# Altium PCB SW6208 Demo board.PcbDoc (part 2 of 2)
Units mm, origin at the board's own origin, x right, y up, seen from the top; angles counter-clockwise.
Board outline 56.6 x 30 mm, 4 copper layers (Top Layer, Mid-Layer 1, Mid-Layer 2, Bottom Layer); 47 components, 75 nets, 261 pads, 411 vias.
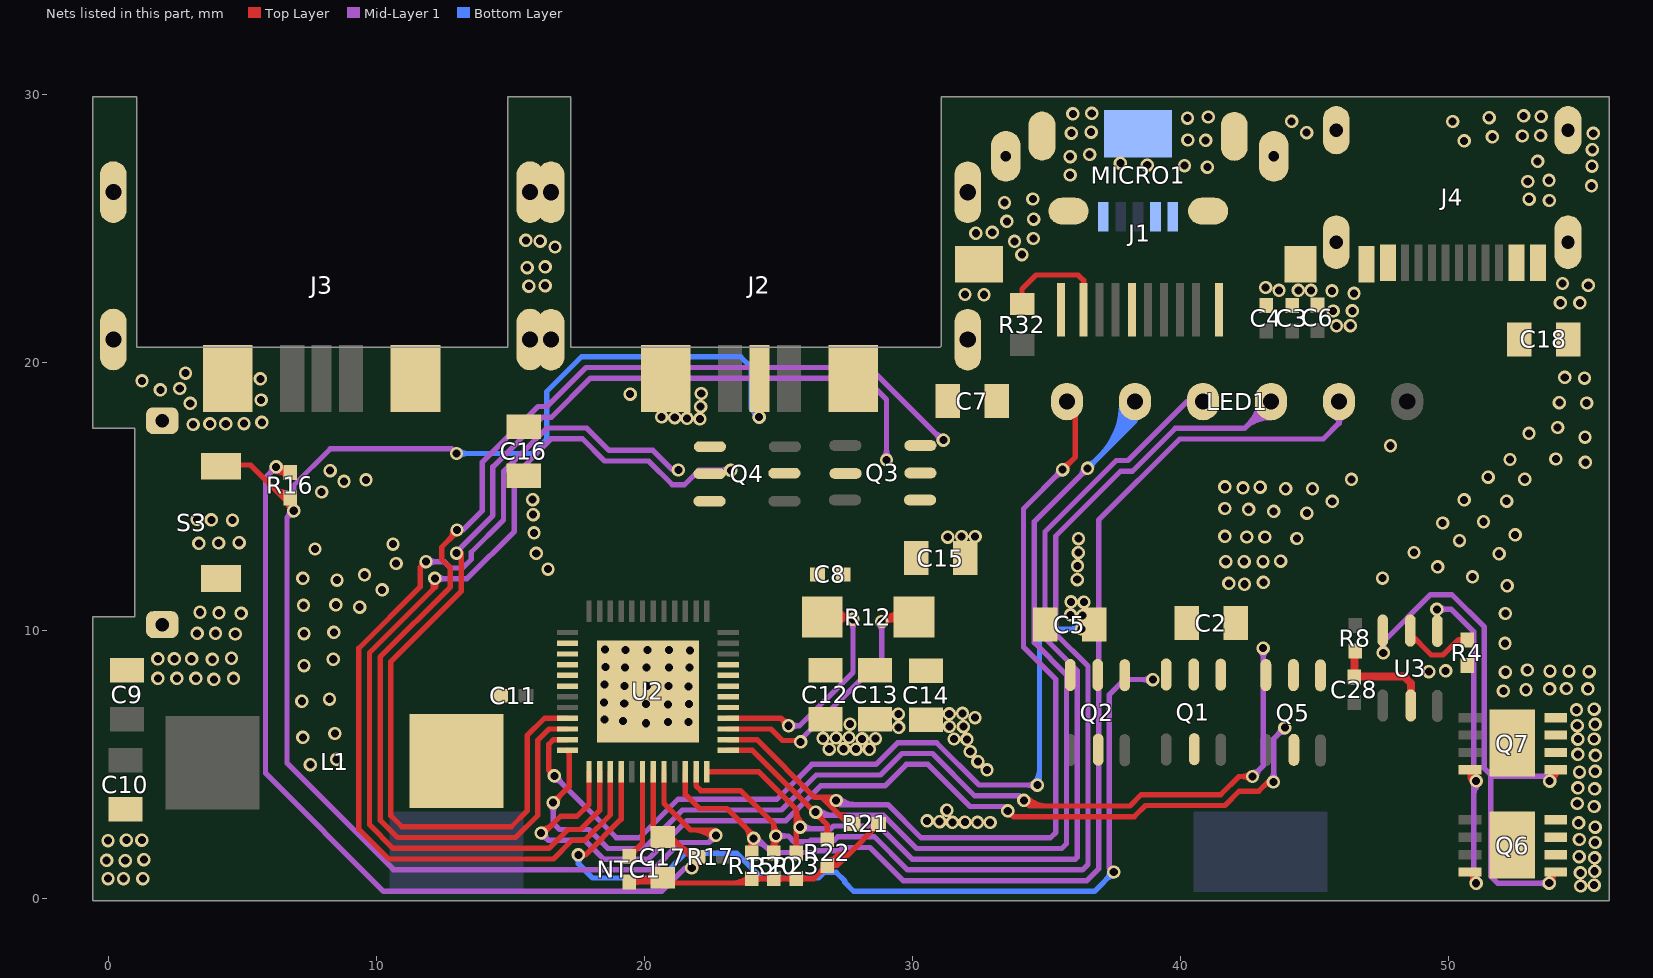
[diagram p4: the nets of this part, all layers, seen from the top]

## Via types
v1: diameter 0.5, hole 0.3, Top Layer to Bottom Layer, tented both sides, 411 vias

## Nets (pads, with @x,y where several pads share a name; then routed paths per layer and width w, separated by ;. In a path a pad name is that pad's centre, name@x,y a point inside that pad or via, vN(x,y) a via of type N, cw(c..) or ccw(c..) an arc to the next point about the centre after c; other vN are vias at no path point) (continued)
GND: "J1. 0" C2.1 C3.2 C4.2 C5.1 C6.2 C7.1 C9.1 C10.1 C12.1 C13.1 C14.1 C15.1 C16.1 C17.2 C18.1 J1.0 J1.9 J1.10 J2.0 J2.5 J3.0 J3.5 J4.B1/A12 J4.B12/A1 J4.GND MICRO1.4 MICRO1.5 MICRO1.6 MICRO1.7 MICRO1.8 MICRO1.9 NTC1.1 Q6.6 Q6.7 Q6.8 Q7.6 Q7.7 Q7.8 R4.1 R15.1 R20.1 R21.2 R22.2 R23.2 S3.2 U2.49 | length 19.4
  Top Layer w0.2: NTC1.1@19.439,0.629 20.542,0.629 C17.2@20.698,0.785 20.892,0.591 23.851,0.591 R15.1@24.011,0.75 26.33,0.75 R22.2@26.832,1.253 R22.2@26.837,1.253 ; NTC1.1@19.531,0.629 ccw(c19.531,1.901) C17.2@20.43,1.001 ; NTC1.1@19.548,0.52 cw(c19.811,0.257) 19.811,0.629 cw(c19.811,1.001) NTC1.1@19.548,0.738 ; 20.014,0.629 ccw(c20.014,1.418) C17.2@20.572,0.86 ; 23.315,0.591 ccw(c23.315,1.42) R15.1@23.902,0.834 ; R15.1@24.119,0.641 cw(c24.382,0.378) 24.382,0.75 cw(c24.382,1.122) R15.1@24.119,0.859 ; 24.453,0.75 ccw(c24.453,1.143) R20.1@24.731,0.865 ; 24.483,0.75 cw(c24.483,0.399) R20.1@24.731,0.647 ; R20.1@24.949,0.647 cw(c25.197,0.399) 25.197,0.75 ; R20.1@24.949,0.865 ccw(c25.226,1.143) 25.226,0.75 ; 25.291,0.75 ccw(c25.291,1.139) R23.2@25.566,0.864 ; 25.315,0.75 cw(c25.315,0.396) R23.2@25.566,0.646 ; R23.2@25.784,0.646 cw(c26.035,0.396) 26.035,0.75 ; R23.2@25.784,0.864 ccw(c26.059,1.139) 26.059,0.75 ; 26.526,0.946 cw(c26.832,0.64) R22.2@26.832,1.073 ; R22.2@26.587,1.008 ccw(c26.368,1.227) R22.2@26.678,1.227 ; R22.2@26.832,1.432 ccw(c26.832,1.878) 27.147,1.563 ; R22.2@26.941,1.144 cw(c27.204,0.881) 27.204,1.253 cw(c27.204,1.624) R22.2@26.941,1.362 ; R22.2@26.986,1.278 cw(c27.284,1.278) R22.2@27.073,1.489 ; 28.436,2.479 ccw(c28.121,2.794) R21.2@28.567,2.794 ; R21.2@28.51,2.552 cw(c28.721,2.342) R21.2@28.721,2.64 ; R21.2@28.746,2.794 28.746,2.789 27.618,1.661 ; R22.2@26.837,1.253 27.245,1.661 27.618,1.661 ; R22.2@26.837,1.253 27.21,1.253 27.618,1.661
  other v1: 54.944,0.481 55.451,0.509 -0.012,0.755 0.569,0.755 1.292,0.755 54.937,0.968 55.468,1.029 -0.064,1.439 0.633,1.427 1.33,1.465 55.468,1.533 54.891,1.574 55.485,2.104 -0.012,2.175 0.672,2.188 1.253,2.188 54.898,2.213 55.485,2.674 54.871,2.839 31.499,2.857 31.967,2.862 32.437,2.857 32.912,2.85 31.024,2.882 30.561,2.908 31.293,3.306 55.451,3.447 54.818,3.556 55.468,4.102 54.845,4.143 54.904,4.729 55.485,4.756 32.792,4.813 7.542,5.01 32.45,5.122 8.516,5.208 55.496,5.352 54.845,5.394 32.167,5.497 28.403,5.582 26.906,5.59 27.443,5.598 27.906,5.59 31.562,5.965 32.042,5.952 54.838,5.961 55.449,5.964 26.67,5.989 28.134,5.972 28.63,5.98 27.16,6.003 7.264,6.023 27.641,6.021 8.456,6.171 29.491,6.401 31.91,6.426 31.39,6.432 54.819,6.461 27.678,6.518 55.487,6.509 20.074,6.553 20.893,6.592 21.648,6.605 19.216,6.63 18.513,6.694 32.345,6.761 29.485,6.894 31.384,6.906 31.878,6.919 54.792,7.049 55.451,7.08 20.893,7.257 19.255,7.283 20.074,7.27 21.673,7.27 18.5,7.334 7.224,7.374 8.255,7.455 52.059,7.756 52.907,7.803 53.787,7.835 55.217,7.835 54.415,7.851 21.648,7.923 19.268,7.948 20.112,7.936 20.906,7.948 18.513,8 3.938,8.191 1.847,8.23 2.557,8.23 3.267,8.23 4.674,8.23 49.278,8.479 52.137,8.463 55.264,8.479 53.803,8.495 54.51,8.495 49.906,8.511 52.954,8.542 19.28,8.627 20.087,8.627 21.686,8.627 18.551,8.652 20.931,8.639 7.303,8.705 3.886,8.94 8.395,8.941 1.847,8.953 2.466,8.953 3.112,8.953 4.596,8.979 21.712,9.266 19.293,9.292 20.125,9.279 20.931,9.279 18.538,9.305 52.121,9.531 4.738,9.882 7.303,9.897 3.318,9.908 4.003,9.908 8.415,9.944 4.958,10.657 52.137,10.647 4.132,10.67 3.421,10.695 9.379,10.888 7.283,10.95 8.496,10.968 10.222,11.53 52.2,11.684 42.403,11.74 41.818,11.775 43.104,11.81 8.536,11.892 36.16,11.914 7.264,11.963 47.55,11.967 50.912,12.014 9.56,12.092 16.411,12.304 49.608,12.391 36.169,12.427 10.744,12.514 41.702,12.581 42.391,12.581 43.092,12.581 43.747,12.605 51.902,12.878 15.97,12.892 36.198,12.922 48.728,12.925 7.713,13.056 10.623,13.236 3.383,13.265 4.119,13.278 4.88,13.291 50.425,13.365 36.208,13.445 44.354,13.446 31.327,13.496 42.485,13.504 43.162,13.504 31.844,13.523 32.351,13.523 41.667,13.528 52.499,13.585 15.886,13.658 49.797,14.025 51.32,14.072 3.848,14.143 4.635,14.13 3.318,14.155 15.855,14.34 44.728,14.393 43.49,14.463 42.555,14.533 41.667,14.568 45.676,14.835 52.184,14.841 15.834,14.896 50.598,14.889 7.96,15.181 43.934,15.304 44.939,15.304 42.345,15.339 42.987,15.363 41.667,15.374 8.797,15.581 9.618,15.633 46.393,15.654 52.86,15.658 51.493,15.737 8.281,15.982 55.122,16.287 52.31,16.397 54.023,16.413 47.851,16.908 55.107,17.23 53.017,17.371 54.085,17.591 3.168,17.703 3.79,17.723 4.383,17.723 5.064,17.733 5.73,17.78 22.078,17.907 21.139,17.955 21.595,17.934 20.65,17.983 22.104,18.365 3.059,18.494 55.169,18.502 54.148,18.518 5.707,18.616 19.475,18.835 22.128,18.859 1.944,18.993 2.667,19.043 1.259,19.33 5.673,19.406 55.091,19.429 54.353,19.461 2.881,19.62 45.834,21.386 46.352,21.394 45.706,21.937 46.424,21.944 54.189,22.239 54.915,22.239 31.972,22.553 32.68,22.544 46.488,22.599 45.666,22.687 43.688,22.711 44.414,22.711 44.885,22.711 43.193,22.814 15.695,22.866 16.3,22.884 55.23,22.895 54.268,22.965 15.629,23.556 16.3,23.585 34.096,24.043 16.671,24.327 33.817,24.535 16.113,24.544 15.582,24.571 34.524,24.642 32.375,24.839 32.988,24.874 33.532,25.281 34.533,25.367 33.444,25.983 53.777,26.061 53.025,26.109 34.506,26.119 55.351,26.61 52.971,26.771 53.765,26.813 35.897,27.011 41.016,27.308 55.37,27.346 38.772,27.382 40.163,27.363 37.77,27.456 53.341,27.523 35.897,27.701 36.621,27.777 55.383,27.956 50.597,28.29 40.288,28.32 40.95,28.306 51.65,28.433 52.77,28.468 53.453,28.488 35.939,28.574 55.416,28.567 44.72,28.595 36.677,28.611 50.167,29.007 44.162,29.014 40.274,29.137 51.53,29.151 41.048,29.179 53.473,29.197 52.816,29.217 35.995,29.291 36.701,29.311
IRQ: 
KEY-1: 
KEY/GSET/IDA1: J2.3 R16.2 S3.1 U2.20 | length 69.4
  Top Layer w0.2: S3.1@4.207,16.193 5.312,16.193 R16.2@6.677,14.828 ; 6.064,15.441 ccw(c6.786,16.162) R16.2@6.786,15.142 ; 6.406,15.099 ccw(c6.786,15.479) R16.2@6.786,14.942 ; R16.2@6.686,14.776 ccw(c6.935,14.919) v1@6.926,14.632 ; R16.2@6.69,14.817 cw(c6.531,14.618) v1@6.786,14.618 ; R16.2@6.75,14.967 ccw(c6.939,14.811) v1@6.766,14.638 ; R16.2@6.882,14.817 ccw(c7.04,14.618) v1@6.786,14.618 ; R16.2@6.904,14.839 ccw(c7.108,14.67) v1(6.921,14.482) v1@6.786,14.618 ; v1@6.993,14.614 cw(c7.182,14.963) R16.2@6.786,14.963 v1@6.786,14.618 ; U2.20@20.737,4.739 20.737,3.557 21.724,2.57 22.515,2.57 ; 21.823,2.57 cw(c21.823,1.514) v1@22.57,2.261 ; 22.306,2.57 cw(c22.306,1.996) v1@22.711,2.402 ; v1@22.54,2.43 ccw(c22.428,2.483) 22.515,2.57 ; v1@22.663,2.516 cw(c22.647,2.702) 22.515,2.57 ; v1(22.676,2.367) v1@22.652,2.57 ; J2.3@24.13,18.325 cw(c23.864,17.982) v1@24.298,17.982 ; v1@24.183,18.079 ccw(c23.906,18.356) J2.3@24.298,18.356 ; v1(24.289,17.973) v1@24.298,17.982 ; J2.3@24.298,18.314 ccw(c24.63,18.314) v1@24.395,18.079 ; J2.3@24.298,19.418 v1@24.298,17.982 ; J2.3@24.466,18.325 ccw(c24.732,17.982) v1@24.298,17.982 ; 22.515,2.57 v1@22.652,2.57 ; 22.515,2.57 22.73,2.356 ccw(c22.461,2.379) v1@22.652,2.57
  Mid-Layer 1 w0.2: v1@6.771,14.481 cw(c6.422,14.477) 6.669,14.23 ; v1@6.815,14.588 ccw(c6.559,14.844) 6.921,14.844 ccw(c7.283,14.844) v1@7.027,14.588 ; v1@6.919,14.332 ccw(c6.916,13.983) 6.669,14.23 ; v1@22.526,2.367 cw(c22.164,2.367) 22.42,2.111 cw(c22.676,1.854) v1@22.676,2.217 ; v1(22.676,2.367) 22.412,2.103 21.343,2.103 20.32,1.08 10.655,1.08 6.669,5.066 6.669,14.23 ; 6.669,14.23 v1(6.921,14.482) 6.921,15.434 8.285,16.798 12.819,16.798 v1(12.996,16.621) ; v1(12.996,16.621) 13.027,16.652 13.041,16.652 13.052,16.663 v1(12.996,16.621)
  Bottom Layer w0.2: v1(12.996,16.621) 15.828,16.621 16.362,17.155 16.362,18.925 17.666,20.23 23.6,20.23 23.983,19.847 23.983,18.308 24.289,18.001 v1(24.289,17.973) ; v1@13.102,16.515 cw(c13.358,16.259) 13.358,16.621 cw(c13.358,16.983) v1@13.102,16.727 ; 24.013,18.277 cw(c23.709,17.973) v1@24.139,17.973 ; 24.081,18.209 ccw(c24.289,18.417) v1@24.289,18.123
LED1/SCL: LED1.5@35.774,18.558 R21.1 U2.26 | length 37.3
  Top Layer w0.2: U2.26@23.137,5.939 24.207,5.939 26.358,3.788 26.626,3.788 ; v1@27.045,3.579 ccw(c26.626,3.264) 26.626,3.788 ; v1(27.165,3.669) 27.046,3.788 26.626,3.788 ; 27.487,3.1 cw(c27.181,2.794) R21.1@27.614,2.794 ; R21.1@27.548,3.039 ccw(c27.768,3.258) R21.1@27.768,2.948 ; R21.1@27.758,2.947 cw(c27.719,3.553) 27.291,3.124 ; R21.1@27.785,2.629 27.291,3.124 ; R21.1@27.793,2.794 27.463,3.124 27.291,3.124 ; v1(35.617,16.018) 36.09,16.491 36.09,18.242 LED1.5@35.774,18.558 ; v1@35.617,16.168 ccw(c35.617,16.53) 35.873,16.274 ccw(c36.129,16.018) v1@35.767,16.018 ; 26.626,3.788 27.291,3.124
  Mid-Layer 1 w0.2: v1@27.13,3.634 ccw(c27.414,3.918) 27.414,3.516 ; v1(27.165,3.669) 27.318,3.516 29.09,3.516 30.327,2.28 35.163,2.28 35.359,2.476 35.359,8.191 34.157,9.394 34.157,14.558 v1(35.617,16.018) ; v1@27.271,3.775 ccw(c27.897,4.401) 27.897,3.516 ; v1@35.467,16.018 cw(c35.105,16.018) 35.361,15.762 cw(c35.617,15.506) v1@35.617,15.868
LED2/SDA: LED1.5@38.314,18.558 R22.1 U2.25 | length 43.5
  Top Layer w0.2: U2.25@23.137,5.539 24.041,5.539 26.832,2.748 R22.1@26.832,2.205 ; v1@26.398,3.088 cw(c26.398,2.863) 26.558,3.022 ; v1@26.548,3.238 ccw(c27.047,3.238) 26.694,2.886 ; R22.1@26.723,2.339 ccw(c26.46,2.602) 26.832,2.602 ccw(c27.204,2.602) R22.1@26.941,2.339
  Mid-Layer 1 w0.2: v1(26.398,3.238) 26.521,3.116 28.924,3.116 30.161,1.88 35.583,1.88 35.759,2.056 35.759,8.357 34.557,9.559 34.557,14.078 v1(36.543,16.064) ; v1@26.504,3.344 ccw(c27.056,3.896) 27.056,3.116 ; v1@36.393,16.064 cw(c36.03,16.064) 36.286,15.808 cw(c36.543,15.552) v1@36.543,15.914
  Bottom Layer w0.2: v1(36.543,16.064) 38.314,17.835 ; v1@36.543,16.214 ccw(c36.543,16.576) 36.799,16.32 ccw(c37.055,16.064) v1@36.693,16.064 ; 37.02,16.542 ccw(c35.104,18.458) LED1.5@37.814,18.458 ; 37.362,16.883 ccw(c35.787,18.458) LED1.5@38.014,18.458 ; 37.703,17.224 ccw(c36.47,18.458) LED1.5@38.214,18.458 ; 38.045,17.566 ccw(c37.152,18.458) LED1.5@38.414,18.458 ; LED1.5@38.206,17.97 cw(c38.176,17.835) 38.314,17.835 ; LED1.5@38.314,18.558 38.314,17.835 ; LED1.5@38.422,17.97 ccw(c38.452,17.835) 38.314,17.835
LED3/IRQ: LED1.4 R23.1 U2.24 | length 39.3
  Top Layer w0.2: U2.24@22.337,4.739 24.275,4.739 25.675,3.339 ; R23.1@25.566,1.842 ccw(c25.303,2.105) 25.675,2.105 ccw(c26.047,2.105) R23.1@25.784,1.842 ; R23.1@25.675,1.708 25.675,3.339 ; 25.675,2.893 ccw(c26.014,2.893) v1@25.789,2.64 ; v1@25.922,2.789 cw(c26.412,3.339) 25.675,3.339
  Mid-Layer 1 w0.2: v1(25.822,2.677) 25.888,2.612 26.957,2.612 27.062,2.716 28.759,2.716 29.995,1.48 36.09,1.48 36.159,1.548 36.159,8.522 34.957,9.725 34.957,13.7 37.614,16.358 38.053,16.358 40.253,18.558 ; v1@25.928,2.783 ccw(c26.342,3.198) 26.342,2.612 ; LED1.4@40.362,18.467 ccw(c40.253,18.446) 40.253,18.558 ; LED1.4@40.362,18.649 cw(c40.253,18.67) 40.253,18.558 ; LED1.4@40.854,18.558 40.253,18.558
LED4/I2C: LED1.3 R20.2 U2.23 | length 46
  Top Layer w0.2: U2.23@21.937,4.739 21.937,4.215 22.113,4.039 23.59,4.039 24.84,2.789 ; R20.2@24.731,1.843 ccw(c24.468,2.106) 24.84,2.106 ccw(c25.212,2.106) R20.2@24.949,1.843 ; v1@24.785,2.27 cw(c24.502,2.106) 24.817,2.022 ; v1@24.8,2.248 cw(c24.664,2.134) 24.835,2.089 cw(c24.984,2.049) v1@24.949,2.199 ; R20.2@24.804,1.973 cw(c25.188,1.87) v1@24.99,2.215 ; R20.2@24.84,1.709 v1@24.84,2.27 ; R20.2@24.84,1.802 cw(c25.457,1.802) v1@25.021,2.239 ; v1(24.915,2.345) v1@24.84,2.27 ; v1@25.003,2.466 cw(c25.241,2.789) 24.84,2.789 ; v1@24.84,2.27 24.84,2.789
  Mid-Layer 1 w0.2: v1(24.915,2.345) 25.377,2.345 25.594,2.127 26.151,2.127 26.213,2.19 27.102,2.19 27.228,2.316 28.593,2.316 29.83,1.08 36.351,1.08 36.559,1.287 36.559,8.688 35.357,9.891 35.357,13.534 37.78,15.958 38.218,15.958 39.818,17.558 42.394,17.558 ; v1@25.021,2.239 cw(c25.277,1.983) 25.277,2.345 cw(c25.277,2.707) v1@25.021,2.451 ; 42.611,17.775 ccw(c41.928,18.458) LED1.3@42.894,18.458 ; 42.727,17.891 cw(c43.372,17.246) LED1.3@43.389,18.158 ; LED1.3@43.385,17.958 ccw(c43.36,16.592) 42.394,17.558 ; LED1.3@43.394,18.558 42.394,17.558
LED5/CSET: LED1.2 R15.2 U2.22 | length 46.1
  Top Layer w0.2: U2.22@21.537,4.739 21.537,3.889 22.056,3.37 23.083,3.37 24.011,2.442 R15.2@24.011,1.703 ; 23.748,2.704 cw(c23.302,2.258) v1@23.933,2.258 ; R15.2@23.902,1.837 ccw(c23.639,2.1) 24.011,2.1 ccw(c24.382,2.1) R15.2@24.119,1.837 ; R15.2@23.948,1.865 cw(c24.353,1.757) v1@24.154,2.126 ; v1@23.953,2.183 cw(c23.726,2.052) 23.98,1.984 ; R15.2@24.011,1.721 cw(c24.621,1.721) v1@24.189,2.152
  Mid-Layer 1 w0.2: v1@24.083,2.108 cw(c24.083,1.408) 24.578,1.903 ; v1(24.083,2.258) 24.223,2.258 24.754,1.727 26.316,1.727 26.379,1.79 27.267,1.79 27.393,1.916 28.427,1.916 29.664,0.68 36.517,0.68 36.959,1.122 36.959,14.133 39.984,17.158 45.341,17.158 45.934,17.751 ; LED1.2@45.767,17.987 cw(c45.684,17.751) 45.934,17.751 ; LED1.2@45.934,18.558 45.934,17.751 ; LED1.2@46.101,17.987 ccw(c46.184,17.751) 45.934,17.751
NetC28_0: 
NetC28_2: C28.2 R8.1 U3.5 | length 4.5
  Top Layer w0.3: 46.502,8.895 cw(c46.853,8.895) R8.1@46.605,9.143 ; R8.1@46.531,9.242 46.502,9.213 C28.2@46.502,8.279 46.516,8.293 48.36,8.293 48.607,8.046 U3.5@48.607,7.22 ; C28.2@46.576,8.378 ccw(c46.782,8.584) 46.782,8.293
NetD6_1: 
NetJ1_4: 
NetJ1_8: J1.1 R32.1 | length 4.3
  Top Layer w0.2: R32.1@34.099,22.195 34.099,22.757 34.623,23.281 36.194,23.281 36.396,23.08 J1.1@36.396,21.981
NetQ6_4: Q6.4 Q7.4 U3.1 | length 16.4
  Top Layer w0.2: Q7.4@50.767,4.76 cw(c50.639,4.632) 50.82,4.632 cw(c51.001,4.632) Q7.4@50.873,4.76 ; 50.82,4.59 ccw(c51.063,4.59) v1@51.037,4.348 ; 50.836,4.572 ccw(c51.162,4.659) v1@51.022,4.352 ; v1@50.893,4.413 ccw(c50.638,4.439) 50.82,4.621 ; v1@50.904,0.631 ccw(c50.568,0.75) Q6.4@50.82,1.001 51.045,0.776 v1(51.045,0.581) ; v1@51.027,4.547 cw(c51.001,4.802) 50.82,4.621 ; v1(51.043,4.398) 50.82,4.621 ; v1@51.045,0.762 cw(c51.309,0.762) Q6.4@51.123,0.948 ; v1@51.045,0.774 cw(c51.279,0.774) Q6.4@51.12,0.946 ; v1@51.059,4.547 cw(c51.087,4.813) Q7.4@50.82,4.813 50.82,4.621
  Mid-Layer 1 w0.2: v1(49.578,10.804) 50.12,10.804 50.95,9.974 50.95,0.676 v1(51.045,0.581) ; v1@49.684,10.698 cw(c49.94,10.442) 49.94,10.804 cw(c49.94,11.167) v1@49.684,10.911 ; 50.95,1.172 ccw(c51.636,1.172) v1@51.151,0.688 ; 50.95,3.813 cw(c51.627,3.813) v1@51.149,4.292
NetQ6_5: Q6.5 Q7.5 U3.3 | length 23
  Top Layer w0.2: v1(53.774,0.585) 53.774,0.756 Q6.5@54.02,1.001 ccw(c54.296,0.725) v1@53.919,0.624 ; v1(53.788,4.395) 54.02,4.627 ; v1@53.798,4.545 ccw(c53.819,4.828) 54.02,4.627 ; v1@53.937,4.406 cw(c54.22,4.426) 54.02,4.627 ; Q7.5@53.967,4.76 cw(c53.839,4.632) 54.02,4.632 cw(c54.201,4.632) Q7.5@54.073,4.76 ; Q7.5@54.02,4.813 54.02,4.627 ; Q6.5@53.717,0.948 cw(c53.578,0.81) 53.774,0.81 ccw(c53.578,0.81) Q6.5@53.717,0.948
  Mid-Layer 1 w0.2: v1@47.474,9.288 ccw(c47.217,9.544) 47.58,9.544 ccw(c47.942,9.544) v1@47.686,9.288 ; v1(47.58,9.182) 47.58,9.584 49.351,11.354 50.135,11.354 51.35,10.139 51.35,4.868 51.593,4.626 51.593,4.581 51.593,0.841 51.849,0.585 v1(53.774,0.585) ; 51.593,4.581 53.602,4.581 v1(53.788,4.395) ; v1@53.668,0.479 ccw(c53.412,0.223) 53.412,0.585 ccw(c53.412,0.947) v1@53.668,0.691
NetQ6_9: Q6.9 Q7.9
NetR4_2: R4.2 U3.2 | length 3.2
  Top Layer w0.2: U3.2@48.589,9.883 49.372,9.1 49.805,9.1 50.363,9.659 ; R4.2@50.609,9.553 ccw(c50.363,9.321) 50.363,9.659 ; R4.2@50.609,9.765 cw(c50.363,9.997) 50.363,9.659 ; R4.2@50.721,9.659 50.363,9.659
NetR15_2: 
NetR33_1: 
NetR34_1: 
NetR35_1: 
NetR36_1: 
NetR37_1: 
NetR38_1: 
NetR39_1: 
NetR40_1: 
NetR41_1: 
NetR42_1: 
NTC: NTC1.2 U2.18 | length 4.5
  Top Layer w0.2: NTC1.2@19.439,1.581 19.937,2.079 U2.18@19.937,4.739 ; NTC1.2@19.439,1.761 ccw(c19.439,2.194) 19.745,1.888 cw(c19.439,2.194) NTC1.2@19.439,1.761 ; NTC1.2@19.593,1.607 cw(c19.903,1.607) 19.684,1.826 ccw(c19.903,1.607) NTC1.2@19.593,1.607
SCL: 
SDA: 
SEG1: 
SEG2: 
SEG3: 
SEG4: 
SEG5: 
SEG6: 
SEG7: 
SEG8: 
SEG9: 
SEG10: 
SW: C11.2 L1.2 U2.2 U2.3 U2.4 U2.5 U2.6
VBUS_C: 
VBUSA1: C7.2 J2.1 Q3.1 Q3.3 U2.10 | length 46.8
  Top Layer w0.2: 12.709,13.391 ccw(c12.337,13.763) v1@12.863,13.763 ; 12.872,13.555 cw(c13.013,13.414) v1@13.013,13.613 ; v1(13.013,13.763) 13.013,13.695 12.444,13.126 12.444,12.671 12.767,12.348 12.767,11.639 10.148,9.019 10.148,2.935 10.792,2.29 15.203,2.29 16.031,3.118 16.031,5.923 16.447,6.339 U2.10@17.137,6.339
  Mid-Layer 1 w0.2: v1(13.013,13.763) 13.24,13.763 13.951,14.473 13.951,16.287 16.037,18.373 16.376,18.373 17.832,19.83 28.403,19.83 31.117,17.116 v1(31.163,17.116) ; 30.829,17.404 ccw(c31.163,17.738) v1@31.163,17.266 ; 30.939,17.294 cw(c30.761,17.116) v1@31.013,17.116
VBUSA2: C16.2 J3.1 Q4.1 Q4.3 U2.15 | length 37.7
  Top Layer w0.2: v1@11.706,12.564 cw(c11.474,12.534) 11.639,12.369 ; v1@11.835,12.435 ccw(c11.805,12.203) 11.639,12.369 ; v1(11.855,12.584) 11.639,12.369 ; U2.15@18.737,4.739 18.737,3.934 18.737,3.138 17.788,2.189 17.315,2.189 16.611,1.485 10.466,1.485 9.348,2.603 9.348,9.35 11.639,11.642 11.639,12.369
  Mid-Layer 1 w0.2: v1(11.855,12.584) 12.531,12.584 12.766,12.349 13.222,12.349 13.544,12.671 13.544,12.935 14.751,14.142 14.751,15.956 16.368,17.573 17.852,17.573 18.689,16.737 20.33,16.737 21.063,16.004 v1(21.275,16.004) ; v1@11.961,12.478 cw(c12.217,12.222) 12.217,12.584 cw(c12.217,12.946) v1@11.961,12.69
VBUSB: C5.2 MICRO1.1 Q2.1 Q2.3 U2.11 | length 33.1
  Top Layer w0.2: v1@16.5,4.611 ccw(c16.279,4.643) 16.437,4.801 ; v1@16.627,4.738 cw(c16.595,4.959) 16.437,4.801 ; v1(16.648,4.589) 16.437,4.801 ; U2.11@17.137,5.939 16.613,5.939 16.437,5.763 16.437,4.801
  Mid-Layer 1 w0.2: v1@16.648,4.439 cw(c16.648,4.077) 16.904,4.333 cw(c17.161,4.589) v1@16.798,4.589 ; v1(16.648,4.589) 18.958,2.28 19.823,2.28 21.26,3.717 24.952,3.717 26.255,5.019 28.65,5.019 29.452,5.821 30.917,5.821 32.493,4.246 v1(34.672,4.246) ; v1@34.566,4.14 ccw(c34.31,3.884) 34.31,4.246 ccw(c34.31,4.608) v1@34.566,4.352
  Bottom Layer w0.2: v1@34.566,4.352 ccw(c34.122,4.796) 34.75,4.796 ; v1(34.672,4.246) 34.75,4.324 34.75,9.879 34.94,10.07 v1(36.318,10.07) ; v1@36.212,9.964 ccw(c35.956,9.708) 35.956,10.07 ccw(c35.956,10.432) v1@36.212,10.176
  other v1: 36.36,10.572 35.907,10.597 36.409,11.075 35.925,11.081
VBUSC: C18.2 J4.B4/A9 J4.B9/A4 Q5.1 Q5.3 U2.12 | length 41.9
  Top Layer w0.2: v1(16.601,3.589) 17.198,4.186 17.198,5.478 U2.12@17.137,5.539 cw(c16.989,5.391) 17.198,5.391 ; v1@16.601,3.739 ccw(c16.601,4.101) 16.857,3.845 ccw(c17.113,3.589) v1@16.751,3.589 ; v1@34.133,3.642 ccw(c34.559,4.069) 34.559,3.466 ; v1(34.168,3.678) 34.38,3.466 ; v1@34.189,3.529 cw(c34.221,3.307) 34.38,3.466 ; v1@34.274,3.784 ccw(c35.042,4.552) 35.042,3.466 ; v1@34.317,3.656 ccw(c34.539,3.625) 34.38,3.466 ; v1@42.595,4.458 ccw(c42.339,4.202) 42.339,4.564 ccw(c42.339,4.926) v1@42.595,4.67 ; v1(42.701,4.564) 42.188,4.564 41.509,3.885 38.541,3.885 38.122,3.466 34.38,3.466
  Mid-Layer 1 w0.2: v1@16.495,3.483 cw(c16.239,3.226) 16.601,3.226 cw(c16.963,3.226) v1@16.707,3.483 ; v1(16.601,3.589) 16.601,2.833 16.845,2.589 17.936,2.589 18.645,1.88 19.989,1.88 21.426,3.317 25.118,3.317 26.42,4.619 28.816,4.619 29.618,5.421 30.752,5.421 32.327,3.846 33.999,3.846 v1(34.168,3.678) ; v1(42.701,4.564) 43.096,4.959 v1(43.096,9.353) ; v1@42.701,4.714 ccw(c42.701,5.076) 42.957,4.82 ccw(c43.213,4.564) v1@42.851,4.564 ; v1@42.99,9.247 cw(c42.734,8.991) 43.096,8.991 cw(c43.458,8.991) v1@43.202,9.247
VBUSL: C2.2 J1.4 Q1.1 Q1.3 U2.16 | length 36.4
  Top Layer w0.2: v1(17.543,1.639) 17.804,1.639 ; v1@17.672,1.563 cw(c17.804,1.486) 17.804,1.639 ; v1@17.672,1.714 ccw(c17.804,1.791) 17.804,1.639 ; U2.16@19.137,4.739 19.137,2.972 17.804,1.639
  Mid-Layer 1 w0.2: v1(37.522,1.002) 37.359,1.165 37.359,7.618 37.924,8.183 v1(38.983,8.183) ; v1@38.877,8.077 ccw(c38.621,7.821) 38.621,8.183 ccw(c38.621,8.545) v1@38.877,8.289
  Bottom Layer w0.2: v1@17.446,1.524 cw(c17.267,1.315) 17.543,1.315 ; v1(17.543,1.639) 17.543,1.315 ; v1@17.64,1.524 ccw(c17.818,1.315) 17.543,1.315 ; v1@37.372,1.002 cw(c37.01,1.002) 37.266,0.746 cw(c37.522,0.49) v1@37.522,0.852 ; v1(37.522,1.002) 36.8,0.28 27.819,0.28 27.488,0.61 27.488,0.668 27.166,0.99 26.711,0.99 26.5,0.78 24.37,0.78 23.447,1.703 21.546,1.703 20.623,0.78 18.078,0.78 17.543,1.315
VCC: C17.1 R16.1 R17.1 U2.19 | length 40.9
  Top Layer w0.2: v1@6.22,16.106 ccw(c6.496,16.21) 6.496,15.915 ; v1@6.221,16.103 ccw(c6.512,16.236) 6.429,15.928 ; v1@6.29,15.975 cw(c6.323,15.763) 6.476,15.915 ; v1@6.407,16.177 ccw(c6.786,16.32) R16.1@6.786,15.915 6.476,15.915 ; v1@6.412,16.086 ccw(c6.551,16.05) 6.479,15.925 ; v1@6.415,16.1 ccw(c6.628,16.067) 6.476,15.915 ; v1@6.416,16.143 ccw(c6.811,16.194) R16.1@6.612,15.849 ; 6.446,15.944 ccw(c6.655,16.153) R16.1@6.81,15.901 ; R16.1@6.663,15.822 ccw(c6.476,15.68) 6.476,15.915 ; R16.1@6.663,16.008 cw(c6.476,16.15) 6.476,15.915 ; R16.1@6.705,16.072 cw(c6.519,16.376) v1(6.267,16.124) 6.476,15.915 ; U2.19@20.337,4.739 20.337,2.669 C17.1@20.698,2.309 21.002,2.309 21.744,1.567 R17.1@22.004,1.567 R17.1@22.004,1.382 ; 21.315,1.995 ccw(c21.978,2.659) R17.1@21.978,1.721 ; 21.656,1.654 ccw(c21.978,1.976) R17.1@21.978,1.521 ; v1@21.786,1.302 ccw(c21.808,1.578) R17.1@22.004,1.382 ; R17.1@21.838,1.503 cw(c21.552,1.374) v1(21.774,1.153) R17.1@22.004,1.382 ; v1@21.924,1.164 cw(c22.2,1.186) R17.1@22.004,1.382
  Mid-Layer 1 w0.2: v1@6.117,16.124 cw(c5.755,16.124) 6.011,15.868 cw(c6.267,15.612) v1@6.267,15.974 ; v1(6.267,16.124) 5.869,15.725 5.869,4.689 10.278,0.28 20.651,0.28 21.524,1.153 v1(21.774,1.153)
VMCU: 
VOUT: C8.2 C12.2 C13.2 C14.2 R12.1 U2.28 U2.29 U2.30 U2.31 U2.32 U2.33 | length 16.6
  Top Layer w0.2: U2.28@23.137,6.739 25.102,6.739 v1(25.382,6.459) ; v1@25.232,6.46 ccw(c24.88,6.463) 25.126,6.715 ; v1@25.232,6.463 ccw(c24.9,6.471) 25.132,6.709 ccw(c25.37,6.941) v1@25.379,6.609 ; v1@25.381,6.609 cw(c25.378,6.961) 25.126,6.715 ; R12.1@26.642,10.516 v1@27.706,10.516 ; v1(27.789,10.433) v1@27.706,10.516 ; 25.126,6.715 cw(c24.87,6.459) 25.232,6.459 ccw(c24.87,6.459) 25.126,6.715 ; 25.126,6.715 ccw(c25.382,6.971) 25.382,6.609 cw(c25.382,6.971) 25.126,6.715 ; 25.134,6.708 ccw(c25.377,6.957) 25.381,6.609 cw(c25.377,6.957) 25.134,6.708 ; 25.133,6.708 cw(c24.885,6.465) 25.232,6.461 ccw(c24.885,6.465) 25.133,6.708 ; v1@27.706,10.516 cw(c27.706,11.04) 27.236,10.809 ccw(c27.706,11.04) v1@27.706,10.516 ; v1@27.706,10.516 ccw(c27.706,9.992) 27.236,10.224 cw(c27.706,9.992) v1@27.706,10.516 ; R12.1@27.226,10.516 cw(c27.226,9.87) 27.683,10.327 ccw(c27.226,9.87) R12.1@27.226,10.516
  Mid-Layer 1 w0.2: v1(25.382,6.459) 25.796,6.459 27.789,8.452 v1(27.789,10.433) ; v1@25.488,6.353 cw(c25.745,6.097) 25.745,6.459 cw(c25.745,6.821) v1@25.488,6.565 ; v1@27.683,10.327 cw(c27.427,10.071) 27.789,10.071 cw(c28.151,10.071) v1@27.895,10.327
VOUTA1: C8.1 C15.2 Q1.2 Q1.5 Q2.2 Q2.5 Q3.2 Q3.5 Q4.2 Q4.5 Q5.2 Q5.5 R12.2 U2.9 U2.13 U2.14 U2.27 | length 137.3
  Top Layer w0.2: v1@12.09,11.846 cw(c11.897,11.626) 12.189,11.626 ; v1(12.189,11.958) v1@12.189,11.924 ; v1@12.289,11.846 ccw(c12.482,11.626) 12.189,11.626 ; v1(12.994,12.899) 12.994,12.923 13.074,13.003 13.167,12.91 13.167,11.473 10.548,8.853 10.548,3.101 10.958,2.69 15.037,2.69 15.631,3.284 15.631,6.089 16.281,6.739 U2.9@17.137,6.739 ; v1(16.152,2.456) 16.254,2.456 16.88,3.081 17.491,3.081 17.937,3.527 U2.13@17.937,4.739 ; v1@16.152,2.606 ccw(c16.152,3.214) 16.583,2.784 ; U2.14@18.337,4.739 18.337,3.303 17.622,2.589 17.149,2.589 16.445,1.885 10.632,1.885 9.748,2.769 9.748,9.185 12.126,11.563 ; U2.27@23.137,6.339 24.725,6.339 25.155,5.909 25.79,5.909 v1(25.839,5.86) ; v1(28.858,10.352) v1@29.022,10.516 ; v1@28.951,10.469 ccw(c29.148,10.716) 29.306,10.443 ; R12.2@30.071,10.516 v1@29.022,10.516 ; v1(33.566,3.281) 33.782,3.066 ; v1@33.586,3.133 cw(c33.616,2.9) 33.782,3.066 ; v1@33.715,3.262 ccw(c33.948,3.232) 33.782,3.066 ; v1(43.48,4.362) 43.277,4.362 42.929,4.014 42.204,4.014 41.675,3.485 38.707,3.485 38.288,3.066 33.782,3.066 ; 12.126,11.563 12.126,11.86 v1@12.189,11.924 ; 12.126,11.563 12.189,11.626 ; 12.189,11.626 v1@12.189,11.924 ; 12.189,11.626 12.224,11.661 12.224,11.958 v1@12.189,11.924 ; v1@29.022,10.516 cw(c29.022,10.017) 29.473,10.232 ccw(c29.022,10.017) v1@29.022,10.516 ; v1@29.022,10.516 ccw(c29.022,11.015) 29.473,10.801 cw(c29.022,11.015) v1@29.022,10.516 ; v1@28.822,10.387 cw(c29.134,10.075) 29.134,10.516 ccw(c29.134,10.075) v1@28.822,10.387 ; v1@28.964,10.246 cw(c29.617,9.592) 29.617,10.516 ccw(c29.617,9.592) v1@28.964,10.246
  Mid-Layer 1 w0.2: v1(12.189,11.958) 12.199,11.949 13.388,11.949 15.151,13.712 15.151,15.79 16.534,17.173 17.687,17.173 18.523,16.337 20.164,16.337 21.048,15.454 21.503,15.454 22.04,15.991 v1(23.231,15.991) ; v1@12.295,11.852 cw(c12.528,11.62) 12.528,11.949 ; v1@12.295,12.065 ccw(c12.575,12.344) 12.575,11.949 ; v1(12.994,12.899) 12.994,12.951 14.351,14.308 14.351,16.122 16.203,17.973 16.541,17.973 17.998,19.43 28.238,19.43 29.04,18.627 v1(29.04,16.376) ; v1@16.152,2.306 cw(c16.152,1.943) 16.409,2.199 cw(c16.665,2.456) v1@16.302,2.456 ; v1(16.152,2.456) 16.419,2.189 17.77,2.189 18.48,1.48 20.154,1.48 21.591,2.917 25.284,2.917 26.586,4.219 28.981,4.219 29.784,5.021 30.586,5.021 32.161,3.446 33.401,3.446 v1(33.566,3.281) ; v1@23.125,15.885 ccw(c22.869,15.629) 22.869,15.991 ccw(c22.869,16.353) v1@23.125,16.097 ; v1(25.839,5.86) 25.839,5.936 28.858,8.955 v1(28.858,10.352) ; v1@28.752,10.246 cw(c28.496,9.989) 28.858,9.989 cw(c29.22,9.989) v1@28.964,10.246 ; v1@28.934,16.482 ccw(c28.678,16.738) 29.04,16.738 ccw(c29.402,16.738) v1@29.146,16.482 ; v1@43.374,4.468 ccw(c43.079,4.763) 43.496,4.763 ; v1(43.48,4.362) 43.496,4.378 43.496,5.981 v1(43.904,6.389) ; 43.496,4.685 ccw(c43.803,4.685) v1@43.586,4.468 ; v1@43.754,6.389 cw(c43.392,6.389) 43.648,6.133 cw(c43.904,5.877) v1@43.904,6.239
pads on no net: J1.3 J1.6 J1.7 J1.8 J4.A8 J4.B8 U3.4

## Polygon pours and split planes (outlines as drawn)
B+ on Top Layer "Top Layer-No Net" (solid, pour order 61): 5.821,5.43 5.821,7.063 5.519,7.365 5.276,7.608 1.23,7.608 -0.024,7.608 -0.24,7.392 -0.537,7.096 -0.537,5.437 -0.537,4.883 -0.281,4.627 0.002,4.344 1.783,4.344 1.796,4.344 2.093,4.047 2.835,3.306 5.465,3.306
B+ on Top Layer "Top Layer-No Net" (solid, pour order 60): 1.958,7.036 1.958,3.581 1.958,0.598 2.494,0.062 2.609,-0.053 7.823,-0.053 8.103,-0.053 8.333,0.177 8.346,0.19 8.346,2.013 8.346,2.905 6.268,4.983 5.821,5.43 5.821,7.036
SW on Top Layer "Top Layer-No Net" (solid, pour order 59): 17.438,9.63 17.44,9.628 17.44,7.847 16.643,7.847 16.641,7.845 16.446,8.039 15.106,8.039 15.103,8.039 15.028,7.964 14.925,7.861 14.925,6.255 14.925,3.496 14.768,3.338 11.283,3.338 11.281,3.338 11.026,3.593 11.005,3.614 11.005,8.22 11.008,8.22 12.754,9.965 16.21,9.965 16.211,9.965 16.537,9.639
B- on Top Layer "Top Layer-No Net" (solid, pour order 58): 49.447,7.866 50.655,7.866 50.66,7.861 51.341,7.18 51.341,5.87 51.341,5.276 51.275,5.21 51.26,5.195 50.417,5.195 50.31,5.195 50.249,5.134 50.239,5.124 50.239,4.581 50.239,4.342 50.478,4.104 50.549,4.032 51.056,4.032 51.244,4.032 51.305,3.972 51.361,3.916 51.361,1.646 51.361,1.377 51.331,1.346 51.32,1.357 50.813,1.357 50.803,1.357 50.798,1.352 50.219,1.352 50.208,1.352 50.107,1.25 49.078,0.222 45.564,0.222 45.348,0.222 45.155,0.414 45.149,0.421 45.149,1.425 45.149,3.271 45.423,3.545 46.066,4.188 46.066,6.967 46.066,7.66 46.169,7.762 46.184,7.778 46.872,7.778 46.967,7.778 47.03,7.715 47.066,7.678 47.066,6.912 47.066,6.665 47.218,6.513 47.47,6.261 48.279,6.261 48.825,6.261 48.861,6.297 48.998,6.434 48.998,6.849 48.998,7.642 49.224,7.867
VBUSA2 on Top Layer "Top Layer-No Net" (solid, pour order 57): 23.063,16.669 23.063,17.221 22.949,17.335 22.948,17.333 20.587,17.333 20.307,17.333 19.673,17.968 18.102,19.538 16.459,19.538 13.558,19.538 12.443,20.653 12.442,20.653 10.428,20.653 10.428,18.172 10.464,18.136 11.459,17.14 11.795,17.14 17.634,17.14 18.497,16.277 20.391,14.383 23.041,14.383
VBUSC on Top Layer "Top Layer-No Net" (solid, pour order 55): 53.337,21.942 53.337,18.771 52.155,17.589 44.747,10.181 44.747,10.055 44.747,11.292 45.651,12.197 52.077,18.622 52.103,18.622
VBUSC on Top Layer "Top Layer-No Net" (solid, pour order 54): 42.71,7.652 42.71,10.687 43.946,11.923 50.914,18.891 50.914,19.753 50.914,20.465 51.719,21.27 51.85,21.139 53.124,21.139 53.124,18.873 52.675,18.423 45.576,11.324 45.576,7.821 45.576,7.765 45.37,7.559 45.351,7.54 44.845,7.54
VBUSL on Top Layer "Top Layer-No Net" (solid, pour order 53): 41.411,9.456 41.411,9.614 41.411,11.127 41.052,11.486 40.381,12.157 40.381,12.48 40.381,10.467 39.843,9.929 40.331,9.441 41.097,9.441
VBUSL on Top Layer "Top Layer-No Net" (solid, pour order 52): 36.525,16.75 36.525,19.126 36.525,19.54 37.733,20.747 37.771,20.786 38.023,20.786 38.023,20.128 38.031,20.12 37.266,19.355 37.266,19.194
VBUSL on Top Layer "Top Layer-No Net" (solid, pour order 51): 38.561,7.589 38.645,7.673 38.645,10.151 38.645,14.63 36.842,16.433 36.525,16.75 36.525,18.967 36.525,19.126 37.285,19.886 37.951,20.551 37.951,22.975 38.394,22.975 38.41,22.991 38.473,22.927 38.473,20.805 38.473,20.567 38.869,20.172 40.152,18.888 40.152,18.144 40.152,15.372 40.533,14.992 40.976,14.548 40.976,10.651 40.976,10.05 41.388,9.638 41.847,9.178 41.847,8.386 41.847,7.515 41.784,7.452
VBUSB on Top Layer "Top Layer-No Net" (solid, pour order 49): 35.355,7.726 35.323,7.758 35.323,9.158 35.323,9.253 35.529,9.46 35.593,9.523 35.593,10.542 35.593,11.162 35.721,11.29 35.752,11.321 37.471,11.321 37.884,11.321 38.059,11.146 38.441,10.765 38.441,8.808 38.441,7.742 38.266,7.567 38.075,7.376 35.498,7.376
VBUSA1 on Top Layer "Top Layer-No Net" (solid, pour order 48): 29.104,19.805 29.113,19.797 31.926,19.797 31.953,19.797 32.118,19.632 32.367,19.383 32.367,16.817 32.367,15.194 31.817,14.645 31.742,14.57 29.703,14.57 29.57,14.57 29.479,14.662 29.487,14.67 29.487,16.751 29.487,17.708 29.129,18.066 29.104,18.091 27.373,18.091 27.298,18.091 27.223,18.166 27.208,18.181 27.208,19.815
VOUTA1 on Top Layer "Top Layer-No Net" (solid, pour order 47): 43.666,9.079 43.686,9.059 43.686,5.053 44.007,4.733 44.079,4.661 44.453,4.661 44.479,4.661 44.783,4.965 44.776,4.972 44.776,6.661 44.776,8.868 44.565,9.079
VOUTA1 on Top Layer "Top Layer-No Net" (solid, pour order 46): 39.995,8.99 39.995,4.995 40.329,4.661 40.743,4.661 40.792,4.661 41.077,4.945 41.09,4.958 41.09,6.926 41.09,8.876 40.925,9.04 40.875,9.091 40.444,9.091 40.178,9.091 40.166,9.078
VOUTA1 on Top Layer "Top Layer-No Net" (solid, pour order 45): 36.386,8.952 36.38,8.946 36.38,5.866 36.38,5.019 36.738,4.661 36.765,4.687 37.034,4.687 37.219,4.687 37.627,5.094 37.51,5.212 37.51,7.464 37.51,8.884 37.386,9.007 37.33,9.063 36.621,9.063
VOUTA1 on Top Layer "Top Layer-No Net" (solid, pour order 44): 29.082,12.055 30.956,12.055 31.49,11.521 32.092,10.919 33.014,10.919 33.014,10.877 34.224,9.666 34.224,9.092 34.224,8.903 34.79,8.337 35.538,7.589 35.839,7.589 35.839,6.91 35.519,6.589 35.305,6.803 33.431,6.803 33.431,6.347 33.48,6.298 31.859,7.919 31.859,8.405 31.859,8.582 30.894,9.547 30.451,9.99 30.451,10.842 30.451,11.618 30.548,11.715
VOUTA1 on Top Layer "Top Layer-No Net" (solid, pour order 43): 29.38,9.536 29.386,9.531 30.877,9.531 31.037,9.531 31.361,9.206 33.07,7.497 33.07,6.874 33.07,6.686 33.356,6.401 33.51,6.247 35.962,6.247 44.668,6.247 44.723,6.302 44.734,6.313 44.734,7.171 44.734,7.358 44.492,7.599 44.481,7.61 42.722,7.61 34.928,7.61 34.653,7.885 34.224,8.314 34.224,9.402 34.224,9.666 33.477,10.414 32.993,10.897 31.553,10.897 31.553,10.985 30.795,11.744 30.684,11.854 29.63,11.854
VOUTA1 on Top Layer "Top Layer-No Net" (solid, pour order 42): 30.914,9.547 29.317,9.547 29.153,9.712 29.081,9.783 29.081,10.527 29.081,11.145 28.702,11.524 28.5,11.726 27.394,11.726 27.2,11.726 27.053,11.872 27.019,11.907 27.019,12.491 27.004,12.491 26.855,12.64 26.705,12.79 23.885,12.79 23.566,12.79 23.187,13.169 23.177,13.179 23.177,14.805 23.177,14.969 22.964,15.183 22.952,15.195 22.309,15.195 21.851,15.195 21.786,15.26 21.732,15.314 21.732,15.896 21.732,16.366 21.881,16.515 21.899,16.533 22.619,16.533 25.718,16.533 25.79,16.462 25.998,16.254 25.998,15.706 25.998,15.546 25.522,15.07 25.474,15.117 24.659,15.117 24.606,15.117 24.546,15.058 24.534,15.046 24.534,14.73 24.534,14.683 24.701,14.516 24.778,14.439 25.486,14.439 28.009,14.439 28.146,14.576 28.205,14.635 28.205,14.909 28.205,15.022 28.063,15.165 28.039,15.189 27.087,15.189 27.087,15.195 26.616,15.666 26.616,16.08 26.616,16.11 27.117,16.611 27.158,16.569 27.955,16.569 30.841,16.569 30.924,16.486 30.966,16.444 30.966,16.081 30.966,15.528 30.865,15.426 30.722,15.284 30.288,15.284 29.732,15.284 29.643,15.196 29.58,15.132 29.58,14.772 29.58,14.481 30.02,14.04 31.204,12.856 31.204,11.41 31.204,9.838 31.198,9.831
VOUT on Top Layer "Top Layer-No Net" (solid, pour order 41): 27.444,11.025 27.444,9.674 27.613,9.505 27.732,9.386 27.732,8.561 26.53,8.561 26.461,8.63 25.994,9.097 25.994,9.992
VOUT on Top Layer "Top Layer-No Net" (solid, pour order 40): 31.168,7.338 31.15,7.356 27.595,7.356 25.9,7.356 25.629,7.084 25.593,7.048 22.878,7.048 22.878,8.802 22.909,8.834 22.92,8.844 24.091,8.844 24.096,8.844 24.909,9.656 24.924,9.672 24.924,10.296 24.934,10.296 25.726,11.088 25.783,11.145 25.783,12.233 25.783,12.343 25.804,12.363 25.885,12.444 26.693,12.444 26.806,12.444 26.866,12.384 26.908,12.343 26.908,11.723 26.908,11.561 27.048,11.421 27.444,11.025 27.444,10.411 27.444,9.468 27.78,9.133 27.444,9.468 27.444,9.743 27.444,9.683 27.544,9.583 27.74,9.388 29.768,9.388 30.91,9.388 31.35,8.948 31.362,8.936 31.362,7.516
VBUSC on Top Layer "Top Layer-No Net" (solid, remove dead copper, pour order 38): 47.425,24.408 47.425,20.754 47.531,20.648 47.999,20.18 52.503,20.18 53.17,20.18 53.327,20.336 53.327,21.942 53.096,22.172 52.85,22.419 52.85,23.15 52.85,24.263 52.683,24.43 52.357,24.43 52.238,24.31 52.238,22.474 52.031,22.268 51.856,22.093 50.911,22.093 48.9,22.093 48.121,22.872 48.025,22.967 48.025,23.301 48.025,24.342 47.93,24.437 47.445,24.437 47.429,24.422
GND on Top Layer "Top Layer-No Net" (solid, remove dead copper, pour order 39): -0.972,31.202 -0.622,30.851 56.843,30.851 56.843,-0.917 56.726,-1.034 56.492,-0.8 -1.206,-0.8
B- on Bottom Layer "Top Layer-No Net" (solid, pour order 56): 40.094,3.818 40.104,3.808 47.125,3.808 47.125,-0.013 47.135,-0.023 47.074,0.038 39.697,0.038 39.697,3.786 39.675,3.808
VBUSB on Bottom Layer "Top Layer-No Net" (solid, pour order 50): 36.447,9.777 35.031,9.777 34.671,10.137 33.424,11.384 33.424,19.685 33.424,21.336 35.768,23.68 36.759,24.67 36.759,25.936 36.759,26.004 36.882,26.128 36.883,26.128 37.391,26.128 37.391,24.464 37.666,24.189 37.666,23.267 37.653,23.267 37.006,22.621 34.929,20.544 34.929,18.082 34.929,12.14 35.369,11.7 35.699,11.37 36.195,11.37 36.552,11.37 36.607,11.315 36.649,11.274 36.649,10.173 36.649,9.967 36.456,9.774
B+ on Bottom Layer "Top Layer-No Net" (solid, remove dead copper, pour order 33): 15.565,3.046 14.696,3.915 13.416,3.915 5.758,3.915 5.664,3.821 5.664,0.532 5.97,0.227 15.389,0.227 15.542,0.38 15.542,2.999 15.507,3.034
VBUSB on Bottom Layer "Top Layer-No Net" (solid, pour order 34): 35.031,9.777 33.033,11.775 33.033,12.553 33.033,20.944 33.424,21.336 33.518,21.43 34.641,21.43
GND on Bottom Layer "Top Layer-No Net" (solid, remove dead copper, pour order 35): 56.711,30.468 56.711,-0.393 56.797,-0.479 -0.639,-0.479 -0.639,29.529 -0.329,29.839
no net on Bottom Solder "Top Layer-No Net" (solid): 17.81,10.069 17.81,5.397 17.9,5.308 22.406,5.308 22.508,5.41 22.508,9.98 22.265,10.223 17.977,10.223 17.784,10.031
GND on Bottom Solder "Top Layer-No Net" (solid): 14.067,15.494 14.067,12.887 12.642,11.462 12.581,11.401 10.186,11.401 5.032,11.401 4.668,11.037 3.849,10.219 3.849,6.55 3.849,5.398 4.425,4.822 4.455,4.792 10.853,4.792 15.279,4.792 15.916,5.428 15.946,5.398 16.917,5.398 16.977,5.398 17.19,5.186 17.371,5.004 17.371,4.367 17.371,3.67 17.735,3.306 17.948,3.093 21.949,3.093 24.085,3.093 24.48,3.489 24.743,3.751 24.743,6.357 24.743,6.773 24.852,6.882 25.042,7.071 25.724,7.071 25.766,7.071 26.073,6.764 26.339,6.499 26.339,6.163 26.339,5.618 26.506,5.451 26.632,5.325 28.826,5.325 31.551,5.325 32.306,6.079 33.924,7.697 33.924,8.831 33.924,9.135 33.342,9.717 33.316,9.743 30.303,9.743 23.062,9.743 22.556,10.249 19.67,13.135 19.138,13.135 19.138,13.161 18.353,13.945 17.366,14.933 17.366,15.49
GND on Bottom Solder "Top Layer-No Net" (solid): 51.238,16.407 39.547,16.407 38.637,15.496 37.21,14.069 37.21,10.304 37.21,10.091 37.726,9.575 37.939,9.362 40.853,9.362 41.582,9.362 42.281,10.061 42.341,10.122 43.768,10.122 47.989,10.122 48.354,10.486 49.284,11.417 49.744,11.417 51.153,11.417 51.491,11.755 52.074,12.337 52.074,13.672 52.074,15.578 51.237,16.415
GND on Mid-Layer 1 "Top Layer-No Net" (solid, remove dead copper, pour order 36): -2.257,32.019 -1.09,30.851 58.828,30.851 58.828,-2.319 59.062,-2.553 58.594,-3.02 -2.958,-3.02
GND on Mid-Layer 2 "Top Layer-No Net" (solid, remove dead copper, pour order 37): -2.257,30.501 57.426,30.501 57.66,30.267 56.843,29.45 56.843,-1.618 -2.841,-1.618 -3.425,-1.034

## Keep-outs
Keep-Out Layer:
  circle w0.1: c30.185,4.053 r0.6
  circle w0.1: c9.185,14.053 r0.85
  circle w0.1: c11.685,14.053 r0.6
  circle w0.1: c54,10.848 r0.7
  circle w0.1: c54,14.048 r0.75
  circle w0.003: c11.7,14.045 r0.6
  circle w0.003: c9.2,14.045 r0.85
  circle w0.003: c30.2,4.045 r0.6
  lines w0.1: 43.185,29.93 56.022,29.93 56.022,-0.07 -0.579,-0.07 -0.579,10.533 0.985,10.533 0.985,17.555 -0.579,17.555 -0.579,29.93 1.07,29.93 1.07,20.58 14.904,20.58 14.904,29.93 17.258,29.93 17.258,20.58 31.085,20.58 31.085,29.93 43.238,29.93

## Other copper
Top Layer:
  rectangle net NetQ6_9: 51.496,0.725 53.301,7.066
  pour cut-out: 14.921,20.528 14.906,20.513 14.906,19.57 13.554,19.57 13.075,20.049 13.075,20.59
  pour cut-out: 14.024,17.126 14.024,15.705 13.922,15.603 11.588,15.603 11.588,17.186 11.283,17.491
  pour cut-out: 31.34,20.58 31.338,20.578 31.338,19.858 28.916,19.858 28.916,19.857 28.746,20.027 28.746,20.52
Mid-Layer 1:
  pour cut-out: 28.021,10.447 28.674,10.447 28.733,10.388 28.733,9.174 28.511,9.174 27.789,8.452
Bottom Layer:
  rectangle net LED1/SCL: 35.166,17.649 36.711,19.425
  rectangle net LED2/SDA: 37.435,17.397 39.462,19.6
  rectangle net LED3/IRQ: 40.065,17.298 41.852,19.557
  rectangle net LED4/I2C: 42.51,17.518 44.319,19.458
  rectangle net LED5/CSET: 44.993,17.493 46.803,19.515
  rectangle net FLED/BSET/IDA2: 47.477,17.455 49.422,19.554
  pour cut-out: 36.767,19.566 36.767,17.669 37.351,17.669 37.394,17.626 37.423,17.654 37.423,19.537
  pour cut-out: 39.52,19.566 39.52,17.497 39.463,17.44 39.477,17.426 40.019,17.426 40.019,19.522 40.019,19.523
  pour cut-out: 41.931,19.551 41.874,19.494 41.874,17.526 42.473,17.526 42.487,17.512 42.516,17.54 42.516,19.48
  pour cut-out: 44.313,19.551 44.313,17.569 44.299,17.554 44.313,17.54 44.912,17.54 44.912,19.452 44.998,19.537
  pour cut-out: 46.803,19.515 46.863,19.455 46.863,17.505 47.407,17.505 47.407,19.394 47.511,19.498

## Silkscreen, mask and mechanical layers (free items; w line width, h text height)
Top Overlay:
  circle w0.3: c9.17,14.107 r1.5
  circle w0.3: c54.062,14.006 r1.5
  lines w0.1: 1.706,12.623 0.706,12.623 0.706,15.623 1.706,15.623 ; 1.706,10.623 1.706,17.623 4.206,17.623 4.206,10.623 1.706,10.623 ; 32.43,11.073 32.43,20.373 51.73,20.373 51.73,11.073 32.43,11.073
Bottom Overlay:
  drawing of 4884 lines, arcs and shapes, not listed
  text "SW6208_DEMO_20190621" at 54.986,21.25 h1
  text "B-" at 37.483,1.956 h1
  text "B+" at 4.437,0.775 h1
Mechanical 1:
  drawing of 162 lines, arcs and shapes, not listed
Mechanical 20:
  drawing of 1180 lines, arcs and shapes, not listed